# EAGLE board OpenEVSE_PLUS_v1 (EAGLE 6.2)
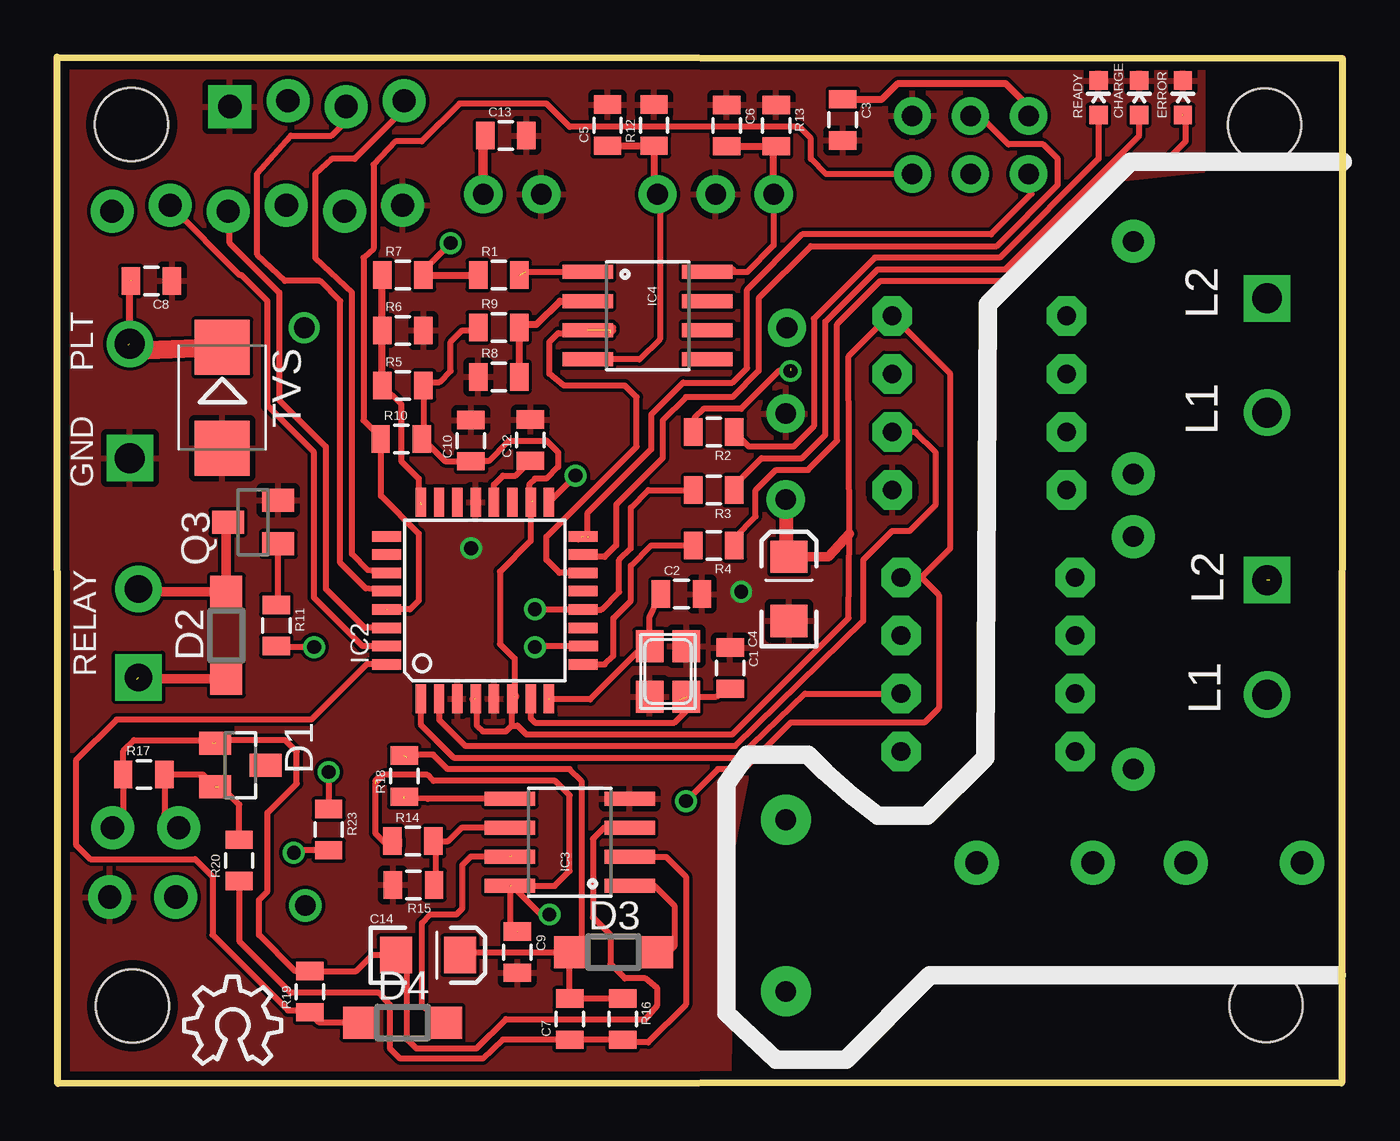
[diagram p0: board, top side]
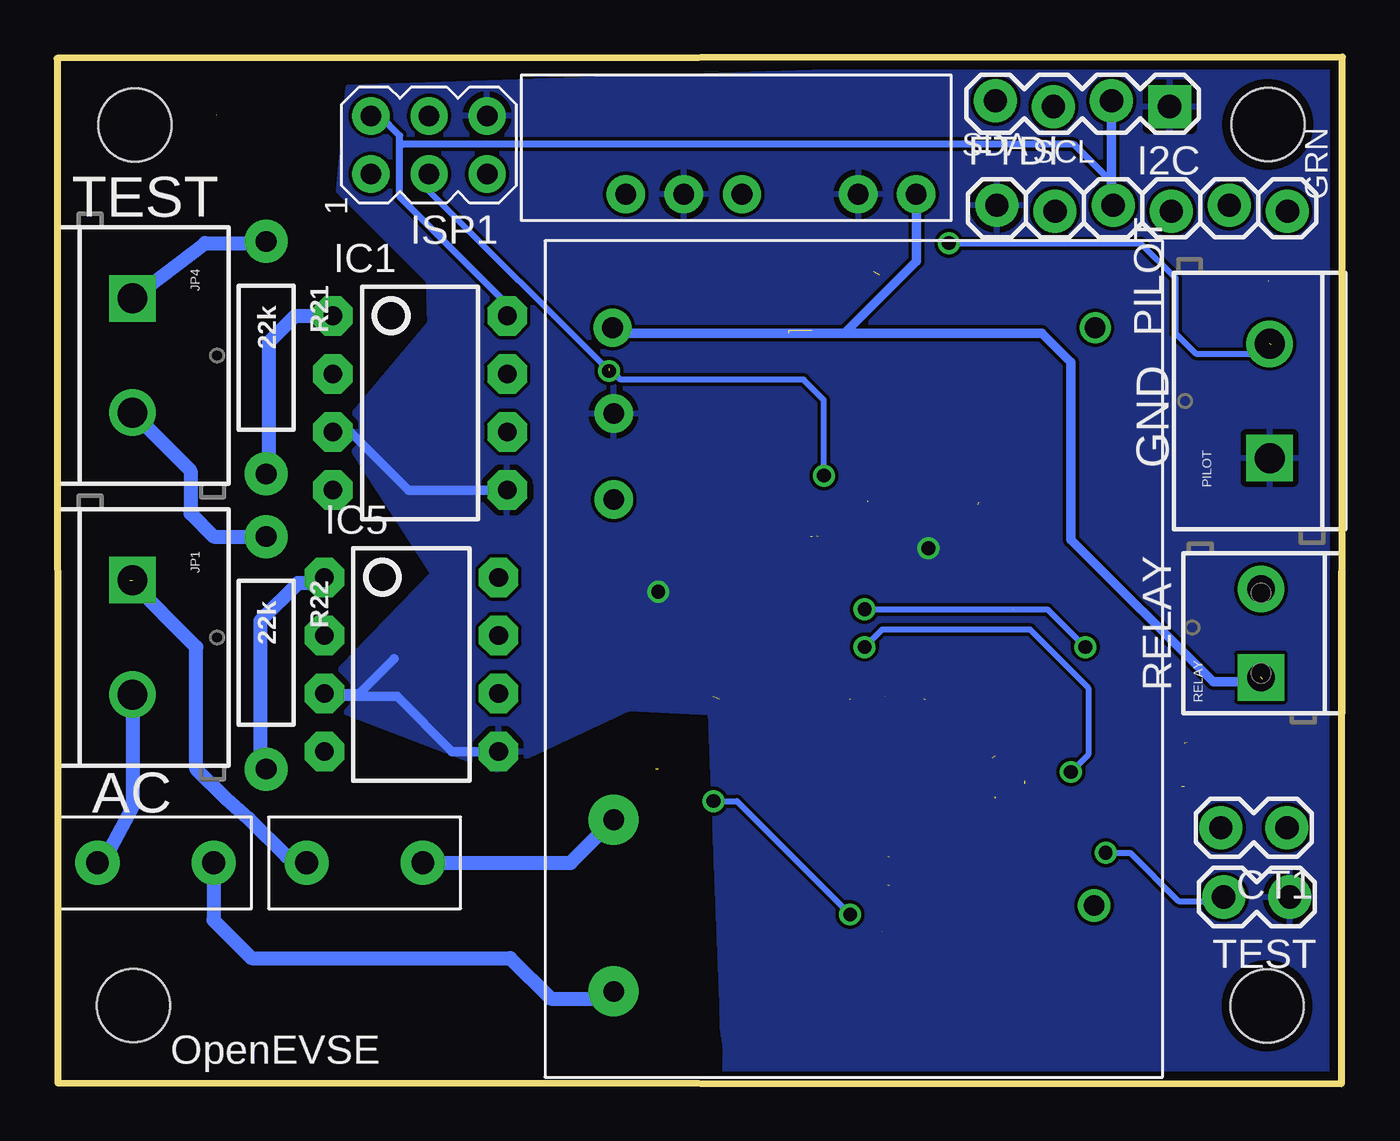
[diagram p1: board, bottom side, seen from below]

Size 56.18 x 44.85 mm. Coordinates in mm from the lower left corner, seen from the top.
Outline: 56.18,44.8 56.15,0.03 0.02,0 0,44.85 56.18,44.8
Copper layers (1*16): Top 0.0356mm / dielectric 1.5011mm / Bottom 0.0356mm
Design rules: minimum track width 6mil, minimum drill 13mil, track to track 6mil, track to pad 6mil, pad to pad 6mil, via to via 6mil, smd to smd 6mil, copper to edge 15mil, drill to drill 6mil, minimum pad ring 7mil, minimum via ring 7mil, stop-mask expansion 4mil, vias tented up to drill 0mil, thermal gap 10mil
Holes 3.2 mm at 52.79,41.9 52.84,3.42 3.28,3.4 3.26,41.91
tRestrict: area 35.4,25.7 to 36.3,26.3; area 36.8,25.7 to 37.6,26.2; area 36.9,41.3 to 37.9,42.1
bRestrict: area 35.4,25.6 to 36.1,26.2; area 36.9,25.4 to 37.6,26.2; area 36.9,41.3 to 37.9,42.1

## Footprints (pad centres in the part's own frame; a part is rotated, then mirrored left to right if it is on the bottom)
0805 = smd 0.8 x 1.2: 1 -0.9,0; 2 0.9,0
EIA3216 = smd 1.4 x 1.6: A 1.4,0; C -1.4,0
LED-0603 = smd 0.8 x 0.8: A 0,-0.75; C 0,0.75
1X02_LOCK = drill 1.016 pad 1.88: 1 -0.178,0; 2 2.718,0
SOT23 = smd 1 x 1.4: 1 -0.95,-1.1; 2 0.95,-1.1; 3 0,1.1
SOD123 = smd 1.4 x 1.4: A 1.9,0; C -1.9,0
DCDC_SIP = drill 0.9 pad 1.676: GND 10.16,0; VIN+ 0,0; VIN- 2.54,0; VOUT+ 12.7,0; VOUT- 7.62,0
1X06_LOCK = drill 1.016 pad 1.88: 1 0,0; 2 2.54,-0.254; 3 5.08,0; 4 7.62,-0.254; 5 10.16,0; 6 12.7,-0.254
1X04_LOCK = drill 1.016 pad 1.88 square: 1 0,0.127 | drill 1.016 pad 1.88: 2 2.54,-0.127; 3 5.08,0.127; 4 7.62,-0.127
DIP08 = drill 0.813 pad 1.727 octagon: 1 -3.81,-3.81; 2 -1.27,-3.81; 3 1.27,-3.81; 4 3.81,-3.81; 5 3.81,3.81; 6 1.27,3.81; 7 -1.27,3.81; 8 -3.81,3.81
TQFP32-08 = smd 1.27 x 0.457: 1 -4.293,2.8; 2 -4.293,2; 3 -4.293,1.2; 4 -4.293,0.4; 5 -4.293,-0.4; 6 -4.293,-1.2; 7 -4.293,-2; 8 -4.293,-2.8; 17 4.293,-2.8; 18 4.293,-2; 19 4.293,-1.2; 20 4.293,-0.4; 21 4.293,0.4; 22 4.293,1.2; 23 4.293,2; 24 4.293,2.8 | smd 0.457 x 1.27: 9 -2.8,-4.293; 10 -2,-4.318; 11 -1.2,-4.293; 12 -0.4,-4.293; 13 0.4,-4.293; 14 1.2,-4.293; 15 2,-4.293; 16 2.8,-4.293; 25 2.8,4.293; 26 2,4.293; 27 1.2,4.293; 28 0.4,4.293; 29 -0.4,4.293; 30 -1.2,4.293; 31 -2,4.293; 32 -2.8,4.293
SO08 = smd 0.61 x 2.21: 1 -1.905,-2.616; 2 -0.635,-2.616; 3 0.635,-2.616; 4 1.905,-2.616; 5 1.905,2.616; 6 0.635,2.616; 7 -0.635,2.616; 8 -1.905,2.616
AVRISP = drill 0.9 pad 1.626: 1 -1.27,2.54; 2 1.27,2.54; 3 -1.27,0; 4 1.27,0; 5 -1.27,-2.54; 6 1.27,-2.54
SCREWTERMINAL-5MM-2 = drill 1.3 pad 2.032 square: 1 0,0 | drill 1.3 pad 2.032: 2 5,0
NX3225 = smd 1.4 x 1.2: 1 -1.1,0.8; 2 1.1,0.8; 3 1.1,-0.8; 4 -1.1,-0.8
AXIAL-0.4 = drill 0.9 pad 1.88: P$1 -5.08,0; P$2 5.08,0
SCREWTERMINAL-3.5MM-2_LOCK = drill 1.2 pad 2.032 square: 1 -0.178,0 | drill 1.2 pad 2.032: 2 3.678,0
SMB = smd 2.4 x 2.4: A 2.2,0; C -2.2,0
MPM-04E-1205 = drill 0.9 pad 1.676: 5V 3,25.25; 12V 2.95,32.75; GND 3,29 | drill 0.9 pad 2.184: ACL 3,3.75; ACN 3,11.25 | drill 0.9 pad 1.422: NC1 24,7.5 | drill 0.9: NC2 24.05,32.75
BELFUSE1A = drill 1 pad 1.93: IN 2,1.66; OUT 2,6.74

## Placement (x,y rotation side)
C1  22pf  [0805]  29.42,18.16 270 top
C2  22pf  [0805]  27.29,21.39 0 top
C3  .1uf  [0805]  34.35,42.12 270 top
C4  10uf  [EIA3216]  31.99,21.62 90 top
C5  1uf  [0805]  24.06,41.88 90 top
C6  1uf  [0805]  29.27,41.87 270 top
C7  .1uf  [0805]  22.41,2.82 90 top
C8  22pf  [0805]  4.12,35.08 180 top
C9  .1uf  [0805]  20.12,5.74 270 top
C10  .1uf  [0805]  18.09,28.09 90 top
C12  .1uf  [0805]  20.69,28.12 90 top
C13  2.2uf  [0805]  19.61,41.43 0 top
C14  10uf  [EIA3216]  16.21,5.62 0 top
CHARGE  Blue  [LED-0603]  47.3,43.08 0 top
CT1  CT1  [1X02_LOCK]  2.6,11.18 180 bottom
D1  BAS40-06  [SOT23]  8.01,13.92 270 top
D2  1N4148  [SOD123]  7.4,19.58 90 top
D3  1N4148  [SOD123]  24.31,5.74 0 top
D4  1N4148  [SOD123]  15.09,2.67 0 top
DCDC  D107E  [DCDC_SIP]  18.62,38.86 180 bottom
ERROR  Red  [LED-0603]  49.2,43.08 0 top
FTDI  FTDI  [1X06_LOCK]  15.1,38.38 0 bottom
I2C  [1X04_LOCK]  7.55,42.83 180 bottom
IC1  MID400  [DIP08]  40.31,29.74 270 bottom
IC2  MEGA8-AI  [TQFP32-08]  18.7,21.12 90 top
IC3  LMV358  [SO08]  22.41,10.54 90 top
IC4  LMV358  [SO08]  25.81,33.56 270 top
IC5  MID400  [DIP08]  40.7,18.31 270 bottom
ISP1  AVRISP-6  [AVRISP]  39.92,41.02 90 bottom
JP1  [SCREWTERMINAL-5MM-2]  52.89,22 270 bottom
JP4  [SCREWTERMINAL-5MM-2]  52.89,34.32 270 bottom
LOGO1  OSHW_LOGO_8MILX0150-NT  [OSHW_8X150_NOTEXT]  5.54,0.87 0 top
PILOT  TE 1776244-2  [SCREWTERMINAL-5MM-2]  3.18,27.33 90 bottom
Q1  16000  [NX3225]  26.7,18.01 270 top
Q3  2222A  [SOT23]  8.56,24.54 90 top
R1  1k  [0805]  19.3,35.33 0 top
R2  500  [0805]  28.7,28.47 180 top
R3  500  [0805]  28.7,25.93 180 top
R4  500  [0805]  28.7,23.52 180 top
R5  56k  [0805]  15.11,30.51 0 top
R6  100k  [0805]  15.11,32.92 0 top
R7  200k  [0805]  15.11,35.33 0 top
R8  20k  [0805]  19.3,30.89 0 top
R9  20k  [0805]  19.3,33.05 0 top
R10  10k  [0805]  15.04,28.16 0 top
R11  500  [0805]  9.58,20.02 270 top
R12  2.5k  [0805]  26.09,41.88 90 top
R13  2.5k  [0805]  31.43,41.87 270 top
R14  100k  [0805]  15.55,10.59 0 top
R15  20k  [0805]  15.58,8.69 180 top
R16  100k  [0805]  24.72,2.82 270 top
R17  330  [0805]  3.79,13.51 0 top
R18  100  [0805]  15.17,13.44 90 top
R19  10k  [0805]  11.05,4.01 90 top
R20  1k  [0805]  7.96,9.76 90 top
R21  22k  [AXIAL-0.4]  47.05,31.73 270 bottom
R22  22k  [AXIAL-0.4]  47.05,18.82 270 bottom
R23  500  [0805]  11.87,11.1 270 top
READY  Green  [LED-0603]  45.52,43.08 0 top
RELAY  TE 1776275-2  [SCREWTERMINAL-3.5MM-2_LOCK]  3.56,17.93 90 bottom
TEST  CT1  [1X02_LOCK]  2.47,8.16 180 bottom
TVS  P6SMB16A  [SMB]  7.22,29.97 270 top
U$1  MPM-04E-1205  [MPM-04E-1205]  34.85,0.28 0 bottom
U$2  BEL1AFUSE  [BELFUSE1A]  47.68,7.65 90 bottom
U$5  BEL1AFUSE  [BELFUSE1A]  38.54,7.65 90 bottom

## Library data of the parts
C1-C10 C12-C14 CHARGE CT1 ERROR FTDI I2C IC1 IC3-IC5 JP1 JP4 PILOT R1-R23 READY RELAY TEST = SparkFun
D1-D4 TVS = diode
DCDC U$1 U$2 U$5 = Qxd
IC2 = atmel; MPN: ATMEGA8-16AU; OC_FARNELL: 9171371; OC_NEWARK: 73M8863
ISP1 Q1 = adafruit
LOGO1 = ohw-logo
Q3 = transistor-npn

## Nets
12V: C6.2 DCDC.VOUT+ IC4.8 R13.2
+5V: C3.1 C4.A C9.1 C10.1 FTDI.3 I2C.2 IC1.8 IC2.4 IC2.6 IC2.18 IC3.8 IC5.8 ISP1.2 R5.2 R9.1 R10.2 R14.1 U$1.5V
+12V: C13.1 D2.C DCDC.VIN+ RELAY.1 U$1.12V
-12V: C5.1 DCDC.VOUT- IC4.4 R12.1
ADC2: IC2.25
ADC3: IC2.26
ADC6: IC2.19
ADC7: IC2.22
GND: C1.1 C2.2 C3.2 C4.C C5.2 C6.1 C8.1 C9.2 C10.2 C12.2 C13.2 CHARGE.C DCDC.GND DCDC.VIN- ERROR.C FTDI.1 I2C.1 IC1.3 IC1.5 IC2.3 IC2.5 IC2.21 IC3.4 IC5.3 IC5.5 ISP1.6 PILOT.1 Q1.1 Q1.3 Q3.2 R6.2 R8.1 R12.2 R13.1 R15.2 READY.C TEST.1 TVS.A U$1.GND
N$1: ERROR.A R4.1
N$2: Q3.1 R11.1
N$3: C14.C CT1.1 D1.1 IC3.3 R17.1 R19.2
N$4: C1.2 IC2.7 Q1.2
N$5: C2.1 IC2.8 Q1.4
N$6: CHARGE.A R3.1
N$7: U$1.ACL U$2.IN
N$8: C7.1 IC3.2 R16.2 R20.1
N$9: U$1.ACN U$5.IN
N$10: IC4.2 R8.2 R9.2
N$11: IC4.1 R1.2
N$12: JP1.2 U$2.OUT
N$13: JP1.1 U$5.OUT
N$14: IC2.15 ISP1.4
N$15: IC2.17 ISP1.3 R2.2
N$16: IC2.16 ISP1.1
N$17: R2.1 READY.A
N$18: IC1.1 R21.P$2
N$19: IC5.1 R22.P$2
N$20: CT1.2 D1.2 R17.2 R20.2
N$21: D3.A IC3.1
N$22: R23.2 TEST.2
N$23: C7.2 C14.A D3.C R16.1 R18.2
N$24: IC3.6 R14.2 R15.1
N$25: D4.A IC3.7
N$26: IC3.5 R18.1
N$28: JP4.1 R21.P$1
N$29: JP4.2 R22.P$1
N$34: IC2.12 R3.2 R11.2
N$36: IC2.9 R4.2
N$39: I2C.4 IC2.27
N$40: I2C.3 IC2.28
N$44: C12.1 IC2.20
PB1: IC2.13
PD2: D4.C IC2.32 R19.1
PD3: IC2.1 IC5.6
PD4: IC1.6 IC2.2
PD6: IC2.10 R23.1
PD7: IC2.11
PILOT: C8.2 PILOT.2 R1.1 R7.2 TVS.C
PILOTREAD: IC2.24 R5.1 R6.1 R7.1
PWM: IC2.14 IC4.3
RELAY: D2.A Q3.3 RELAY.2
RST: IC2.29 ISP1.5 R10.1
RX-I: FTDI.4 IC2.30
TX: FTDI.5 IC2.31

## Tracks (layer width: path | path; a pad name or v marks a point on that pad's centre or on a via)
12V
  Top 0.254: 29.56,35.59 IC4.8 28.69,35.46 30.16,35.46 31.32,36.63 DCDC.VOUT+ | 31.32,41.02 31.37,41.02 R13.2
  Top 0.305: DCDC.VOUT+ 31.32,41.02 31.3,41.05 | C6.2 R13.2
+5V  (via drill 0.6)  (7 unrouted)
  Top 0.254: 20.76,25.47 IC2.18 20.7,23.71 19.36,22.38 19.36,19.2 20,18.57 20,16.73 | IC1.8 36.63,33.68 | 14.88,10.41 R14.1 14.67,10.54 14.28,10.57 13.9,10.95 13.9,13.11 14.28,13.49 16.18,13.49 16.44,13.24 21.77,13.24 22.41,12.6 22.41,9.3 21.75,8.64 IC3.8 19.79,6.96 C9.1 | 37.77,22.12 39.05,23.39 39.05,31.01 IC1.8 | 18.34,16.66 18.34,15.65 18.6,15.39 19.61,15.39 19.87,15.65 | 36.39,33.57 34.6,31.78 34.62,24.03 34.6,20.35 29.52,15.27 20.5,15.27 20.12,15.65 19.87,15.65 | 36.39,33.57 36.51,33.68 | 19.87,16.79 19.87,15.65 | 16.01,28.18 R5.2 16.01,30.66 16.71,30.66 17.2,31.14 17.2,32.41 17.71,32.92 18.47,32.92 18.47,32.98 R9.1 | 16.01,28.18 15.93,28.09 15.93,28.15 R10.2 | 16.01,28.18 16.01,28.14 16.95,27.2 18.22,27.2 | 20.76,25.43 20.63,25.55 20.63,26.19 20.88,26.44 21.39,26.44 21.9,26.95 21.9,27.59 21.39,28.09 19.74,28.09 18.85,27.2 18.22,27.2 | 18.22,27.2 18.09,27.08 C10.1 | 14.03,13.36 13.9,13.24 | 20,16.41 20,16.73 | 20,16.73 IC2.6 | IC5.8 37.77,22.12 | 37.77,22.12 38.54,21.36 38.54,16.41 37.9,15.78 32.06,15.78 30.03,13.74 | 29.9,13.74 28.88,13.74 v27.49,12.35 | v21.52,7.39 21.14,7.39 19.87,8.66 | IC1.8 36.4,33.55 36.39,33.57 | 31.93,23.01 C4.A | 42.47,42.19 42.47,42.28 ISP1.2
  Top 0.305: IC2.6 19.94,16.78 | C3.1 36.06,43.02 36.76,43.71 41.46,43.71 42.47,42.7 42.47,42.19
  Top 0.406: IC2.6 20,16.92 | 20,16.92 19.87,16.79 | 18.22,16.79 18.34,16.66 | 14.88,10.41 14.88,10.66 | 31.93,23.01 33.71,23.01 34.62,24.03
  Top 0.61: U$1.5V 31.85,23.09 31.93,23.01
  Bottom 0.254: v27.49,12.35 26.47,12.35 v21.52,7.39 | 10.09,38.25 10.09,38.31 FTDI.3 | ISP1.2 42.42,42.32
  Bottom 0.305: IC1.8 36.51,34.06 41.2,38.76 41.2,41.17 | 41.2,41.17 41.2,41.43 42.09,42.32 42.42,42.32 42.47,42.32 | FTDI.3 10.02,39.33 11.74,41.05 41.08,41.05 41.2,41.17
  Bottom 0.406: I2C.2 10.09,38.25
+12V  (1 unrouted)
  Top 0.254: C13.1 18.71,41.34 18.62,41.25
  Top 0.406: D2.C 3.63,17.68 RELAY.1 | DCDC.VIN+ 18.62,41.25 18.62,41.58 18.72,41.68
  Bottom 0.406: DCDC.VIN+ 18.62,35.94 21.77,32.79 | 21.77,32.79 31.67,32.79 U$1.12V | 21.77,32.79 13.14,32.79 11.87,31.52 11.87,23.78 5.64,17.55 3.61,17.55 3.48,17.68
-12V
  Top 0.254: 26.34,38.76 26.34,32.54 25.46,31.65 23.45,31.65 IC4.4 | 26.02,40.98 R12.1
  Top 0.305: C5.1 26.02,40.98 26.09,41.05 R12.1 26.09,39.02 26.19,38.91 DCDC.VOUT- 26.34,38.76
GND  (via drill 0.6)
  Bottom 0.254: IC1.3 44.25,28.47
  Bottom 0.406: 44.25,28.47 44.38,28.6 | IC1.5 40.82,25.93 43.36,28.47 IC1.3 44.25,28.6 | IC5.5 38.92,14.51 41.33,16.92 44.38,16.92 IC5.3 42.98,17.04 41.46,18.57
  other vias: 29.9,21.49 18.09,23.39
  pour Top: -0.1,44.87 3.16,44.97 44.86,44.82 44.73,39.27 42.47,37.87 38.3,33.7 34.75,20.16 25.9,9.92 28.86,9.93 29.26,0.3 24.04,-0.08 -0.07,-0.1 -0.17,25 -0.1,28.61
  pour Bottom: 0.18,44.93 43.46,43.53 43.87,39.02 39.93,35.08 39.88,33.22 43.82,28.55 39.76,22.28 45.04,16.82 36.94,13.72 31.18,16.4 27.63,16.22 27.11,3.48 27.1,2.41 26.97,1.58 27,0 23.08,0.03 16.97,-0.07 6.62,-0.37 -0.35,0.04
  pour Top: -0.23,44.99 3.03,45.1 50.06,44.56 50.06,39.91 44.25,39.27 39.19,34.46 38.94,24.48 30.22,13.98 29.49,10.31 29.34,0.61 41.2,0.04 23.92,0.05 -0.19,0.03 -0.29,28.05 -0.23,28.74
N$1  (1 unrouted)
  Top 0.254: R4.1 29.6,23.86 30.54,24.79 30.54,25.93 31.43,26.82 32.82,26.82 34.09,28.09 34.09,33.17 36,35.08 41.71,35.08 46.92,40.29 48.44,40.29 49.33,41.17 49.33,42.19 49.2,42.32
N$2
  Top 0.254: R11.1 9.66,21.01 Q3.1
N$3  (2 unrouted)
  Top 0.254: C14.C 15.19,5.21 | IC3.3 25,11.2 23.93,11.2 23.42,10.7 23.42,7.27 24.19,6.5 24.19,5.23 24.82,4.6 25.71,4.6 26.24,4.17 26.24,3.43 25.71,2.82 19.61,2.82 18.32,1.53 15.7,1.53 15.3,1.93 15.3,5.46 | 14.91,5.23 15.17,5.62 15.17,5.59 15.3,5.46 | 15.3,5.46 15.3,5.51 C14.C | C14.C 13.77,5.62 13.07,4.92 R19.2 10.41,4.92 8.82,6.5 8.82,8.03 9.2,8.41 9.2,11.84 10.47,13.11 10.47,14.51 9.96,15.01 6.79,15.01 | 6.91,15.01 6.79,14.89 | 6.79,15.01 3.36,15.01 2.89,14.54 R17.1 2.89,11.65 CT1.1 | 6.79,15.01 6.91,14.89
N$4  (1 unrouted)
  Top 0.254: Q1.2 28.82,16.91 C1.2 | IC2.7 20.7,15.96 20.88,15.78 26.98,15.78 27.49,16.28 27.49,16.54 27.23,16.79
N$5  (1 unrouted)
  Top 0.254: Q1.4 25.9,20.41 26.22,21.11 26.22,21.22 C2.1 | Q1.4 26,18.98 | Q1.4 25.49,18.98 23.3,16.79 21.52,16.79
N$6
  Top 0.254: R3.1 29.6,26.14 30.79,27.33 32.57,27.33 33.58,28.35 33.58,33.3 35.87,35.59 41.46,35.59 47.3,41.43 CHARGE.A
N$7
  Bottom 0.254: 31.81,3.96 31.81,3.98 U$1.ACL
  Bottom 0.61: U$2.IN 49.34,7.15 47.68,5.49 36.38,5.49 34.6,3.71 32.06,3.71 31.81,3.96
N$8
  Top 0.254: IC3.2 26.62,9.91 27.49,9.04 27.49,3.46 25.84,1.8 24.69,1.8 24.69,1.9 R16.2 C7.1 19.48,1.92 18.6,1.09 14.99,1.09 14.53,1.55 14.53,3.46 14.08,3.96 10.22,3.96 7.96,6.23 R20.1
N$9
  Bottom 0.61: U$5.IN 33.74,9.65 U$1.ACN
N$10
  Top 0.305: 19.95,30.51 R8.2 R9.2 20.08,33.17 20.95,33.17 21.98,34.2 IC4.2
N$11  (1 unrouted)
  Top 0.254: 20.47,35.47 IC4.1
N$12
  Bottom 0.61: U$2.OUT 54.19,9.65 52.89,12.09 JP1.2
N$13  (1 unrouted)
  Bottom 0.254: U$5.OUT 45.28,9.89 45.32,9.93
  Bottom 0.61: 45.14,9.93 45.32,9.93 46.16,9.93 47.81,11.58 48.82,12.47 50.09,13.74 50.09,19.08 53.02,22
N$14
  Top 0.254: 39.91,42.32 40.31,42.32 41.59,41.05 43.11,41.05 43.74,40.41 43.74,39.27 41.08,36.6 32.95,36.6 30.66,34.32 30.66,31.14 29.52,30 27.49,30 26.47,28.98 26.47,27.33 24.44,25.3 24.44,23.52 23.93,23.01 23.09,23.01 IC2.15 23.01,23.14 | 39.91,42.32 39.81,42.32 | ISP1.4 39.92,42.3 39.91,42.32
N$15  (via drill 0.6)  (1 unrouted)
  Top 0.254: v32.06,31.14 31.55,31.14 29.9,29.49 28.25,29.49 27.87,29.11 27.87,28.54 R2.2 | IC2.17 21.5,25.41 v22.66,26.57
  Bottom 0.254: ISP1.3 39.92,39.01 v32.06,31.14 | v22.66,26.57 22.66,29.87 23.55,30.76 31.55,30.76 32.06,31.27
N$16  (2 unrouted)
  Top 0.254: IC2.16 23.11,24.03 23.24,23.9 | ISP1.1 42.59,38.88 40.82,37.11 32.57,37.11 30.16,34.7 30.16,31.27 29.52,30.63 27.36,30.63 25.96,29.24 25.96,27.71 23.17,24.92 23.17,23.9 | 22.92,23.9 22.79,23.78
N$17
  Top 0.254: READY.A 45.52,40.41 41.2,36.09 35.74,36.09 33.08,33.43 33.08,28.73 32.19,27.84 30.24,27.84 R2.1
N$18
  Bottom 0.61: R21.P$2 46.92,27.46 46.92,32.41 45.78,33.55 IC1.1
N$19
  Bottom 0.254: 47.3,13.62 47.17,13.62 R22.P$2
  Bottom 0.61: IC5.1 44.38,21.87 45.65,21.87 47.3,20.22 47.3,13.62
N$20  (1 unrouted)
  Top 0.254: R20.2 7.96,12.19 7.17,12.98 7.04,12.98 | CT1.2 4.69,11.8 R17.2 6.36,13.51 D1.2
N$21
  Top 0.254: IC3.1 26.12,8.64 26.98,7.77 26.98,6 26.6,5.62 26.34,5.62 | 26.34,5.62 25.84,5.62 | 26.34,5.62 D3.A
N$22  (via drill 0.6)
  Top 0.254: R23.2 10.46,10.2 v10.34,10.09
  Bottom 0.254: v10.34,10.09 9.28,10.09 7.17,7.98 5.36,7.98 TEST.2
N$23  (1 unrouted)
  Top 0.254: 24.69,3.96 24.95,3.71 24.95,3.58 24.81,3.72 R16.1 C7.2 22.41,5.37 D3.C | R18.2 15.72,14.34 | 15.3,14.25 15.42,14.38 16.44,14.38 17.07,13.74 22.41,13.74 22.92,13.24 22.92,6 22.28,5.62 22.29,5.62 D3.C | C14.A 17.71,5.62 17.84,5.74 22.28,5.74 | 22.28,5.74 22.41,5.62 | 22.28,5.74 D3.C
N$24
  Top 0.254: 16.57,8.37 16.57,8.66 | 16.57,8.66 16.57,10.48 R14.2 17.1,10.59 17.71,11.2 19.77,11.2 IC3.6 | R15.1 16.54,8.69 16.57,8.66
  Top 0.406: R14.2 16.59,10.59 16.57,10.57
N$25  (1 unrouted)
  Top 0.254: D4.A 15.93,3.4 15.93,7.01 16.31,7.39 17.45,7.39 17.71,7.65 17.71,9.55 18.09,9.93 19.87,9.93
N$26  (1 unrouted)
  Top 0.254: IC3.5 16.21,12.45 15.17,12.47
N$28
  Bottom 0.254: R21.P$1 47.12,36.73
  Bottom 0.61: JP4.1 49.71,36.73 47.12,36.73 46.92,36.73
N$29
  Bottom 0.61: JP4.2 50.35,26.78 50.35,24.92 49.33,23.9 R22.P$1
N$34  (via drill 0.6)
  Top 0.254: R3.2 25.84,25.93 25.07,25.17 25.07,23.39 24.57,22.89 24.57,21.49 23.79,20.72 IC2.12 20.89,20.72 v20.88,20.73 | v11.23,19.08 9.58,19.08 R11.2
  Bottom 0.254: v20.88,20.73 12.88,20.73 v11.23,19.08
N$36
  Top 0.254: IC2.9 23.93,18.32 24.31,18.7 24.31,20.35 25.07,21.11 25.07,22.63 25.96,23.52 R4.2
N$39
  Top 0.254: IC2.27 13.58,22.45 12.88,23.14 12.88,34.57 11.28,36.07 11.28,39.75 11.99,40.41 13.01,40.41 15.17,42.57 I2C.4
N$40
  Top 0.254: IC2.28 13.49,21.64 12.38,22.76 12.38,34.19 11.49,35.08 9.96,35.08 8.74,36.22 8.74,39.78 10.22,41.43 11.99,41.43 12.63,42.06 I2C.3
N$44
  Top 0.254: IC2.20 19.1,26.18 19.49,26.57 20.04,26.57 C12.1
PD2
  Top 0.254: D4.C 11.46,2.67 11.05,3.13 | 11.05,3.13 10.98,3.2 10.09,3.2 6.79,6.5 6.79,9.04 6.02,9.81 1.45,9.81 0.82,10.44 0.82,14.12 2.6,15.9 11.11,15.9 13.52,18.32 IC2.32 | R19.1 11.05,3.13
PD3
  Top 0.254: IC2.1 15.9,15.68 17.33,14.25 29.77,14.25 32.7,17.04 36.76,17.04 36.82,17.11 | 36.82,17.11 36.89,17.17 | IC5.6 36.82,17.11
PD4
  Top 0.254: IC2.2 16.7,15.9 17.84,14.76 29.65,14.76 35.23,20.22 35.23,22.89 36.51,24.16 37.27,24.16 38.41,25.3 38.41,27.59 37.52,28.47 IC1.6
PD6  (via drill 0.6)
  Top 0.254: IC2.10 20.93,19.12 v20.88,19.08 | v11.87,13.62 R23.1
  Bottom 0.254: v20.88,19.08 20.12,19.84 13.64,19.84 11.11,17.3 11.11,14.38 v11.87,13.62
PILOT  (via drill 0.6)  (2 unrouted)
  Top 0.254: R7.2 16.01,35.54 v17.2,36.73
  Top 0.305: R7.2 R1.1 | PILOT.2 3.18,35.02 C8.2
  Top 0.406: 16.06,35.5 R7.2
  Top 0.813: TVS.C 3.91,32.05 PILOT.2
  Bottom 0.254: v17.2,36.73 8.82,36.73 7.29,35.21 7.29,32.79 6.41,31.9 3.48,31.9 3.1,32.28
PILOTREAD  (1 unrouted)
  Top 0.254: 15.93,25.3 15.8,25.3 15.8,26.44 15.04,27.2 15.04,29.68 R5.1
  Top 0.305: R7.1 R6.1 R5.1
PWM  (2 unrouted)
  Top 0.254: 24.31,32.92 24.19,32.79 21.9,32.79 21.52,32.41 21.52,31.01 22.15,30.51 24.82,30.51 25.33,30 25.33,27.84 21.39,23.9 21.39,22.89 21.96,22.32 IC2.14 | 24.31,33.05 24.19,32.92
RELAY
  Top 0.254: RELAY.2 3.62,21.61 3.64,21.59
  Top 0.406: 3.74,21.49 3.74,21.48 D2.A 7.4,24.51 7.42,24.54 | 3.48,21.74 3.64,21.59 3.74,21.49 | 3.74,21.49 3.74,21.62 3.61,21.74 | 7.55,24.66 7.42,24.54 | 7.42,24.54 Q3.3
RST  (1 unrouted)
  Top 0.254: ISP1.5 33.61,39.75 32.95,40.41 32.95,41.3 32.44,41.81 22.41,41.81 21.39,42.83 17.58,42.83 15.93,41.17 14.79,41.17 13.82,40.16 13.82,36.48 13.39,36.09 13.39,28.98 14.15,28.22 14.14,28.21 R10.1 14.15,28.15 14.15,25.68 15.8,24.03 15.8,21.11 15.42,20.73 IC2.29
RX-I
  Top 0.254: IC2.30 13.44,19.92 11.74,21.62 11.74,27.84 9.71,29.87 9.71,34.57 7.55,36.73 7.55,38.06 FTDI.4
TX
  Top 0.254: IC2.31 13.35,19.12 11.23,21.24 11.23,27.59 9.2,29.62 9.2,34.19 8.06,35.33 7.99,35.33 FTDI.5

## Text on the board
tNames: L2 | PLT | L1 | GND | L2 | RELAY | L1
bNames: SDA | SCL | GRN | TEST | PILOT | GND | RELAY | AC | OpenEVSE